# EAGLE board panelize (EAGLE 9.6.2)
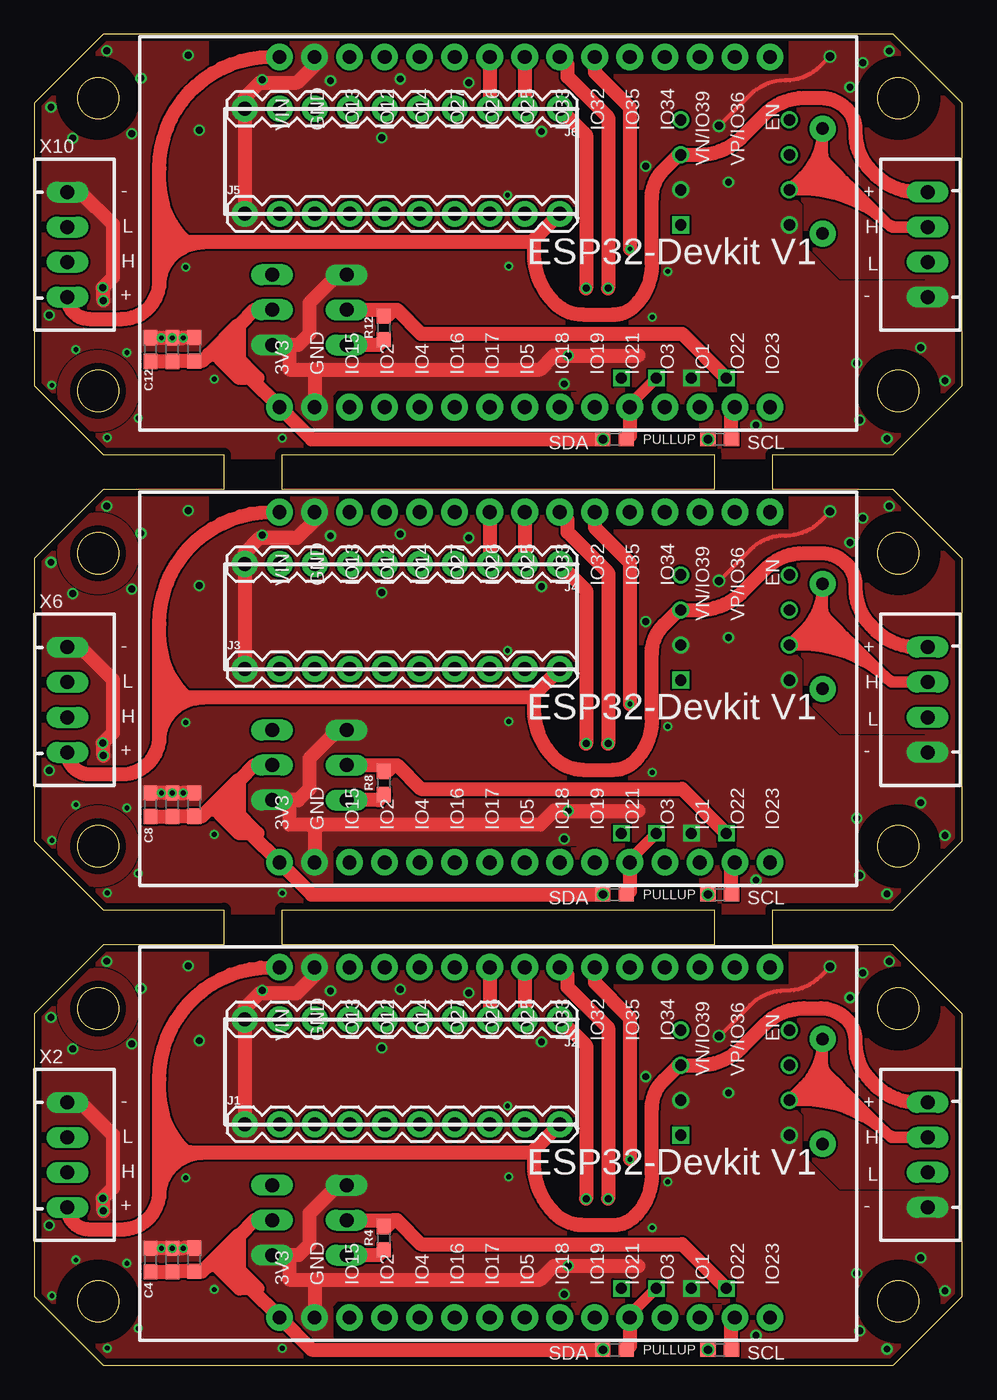
[diagram p0: board, top side]
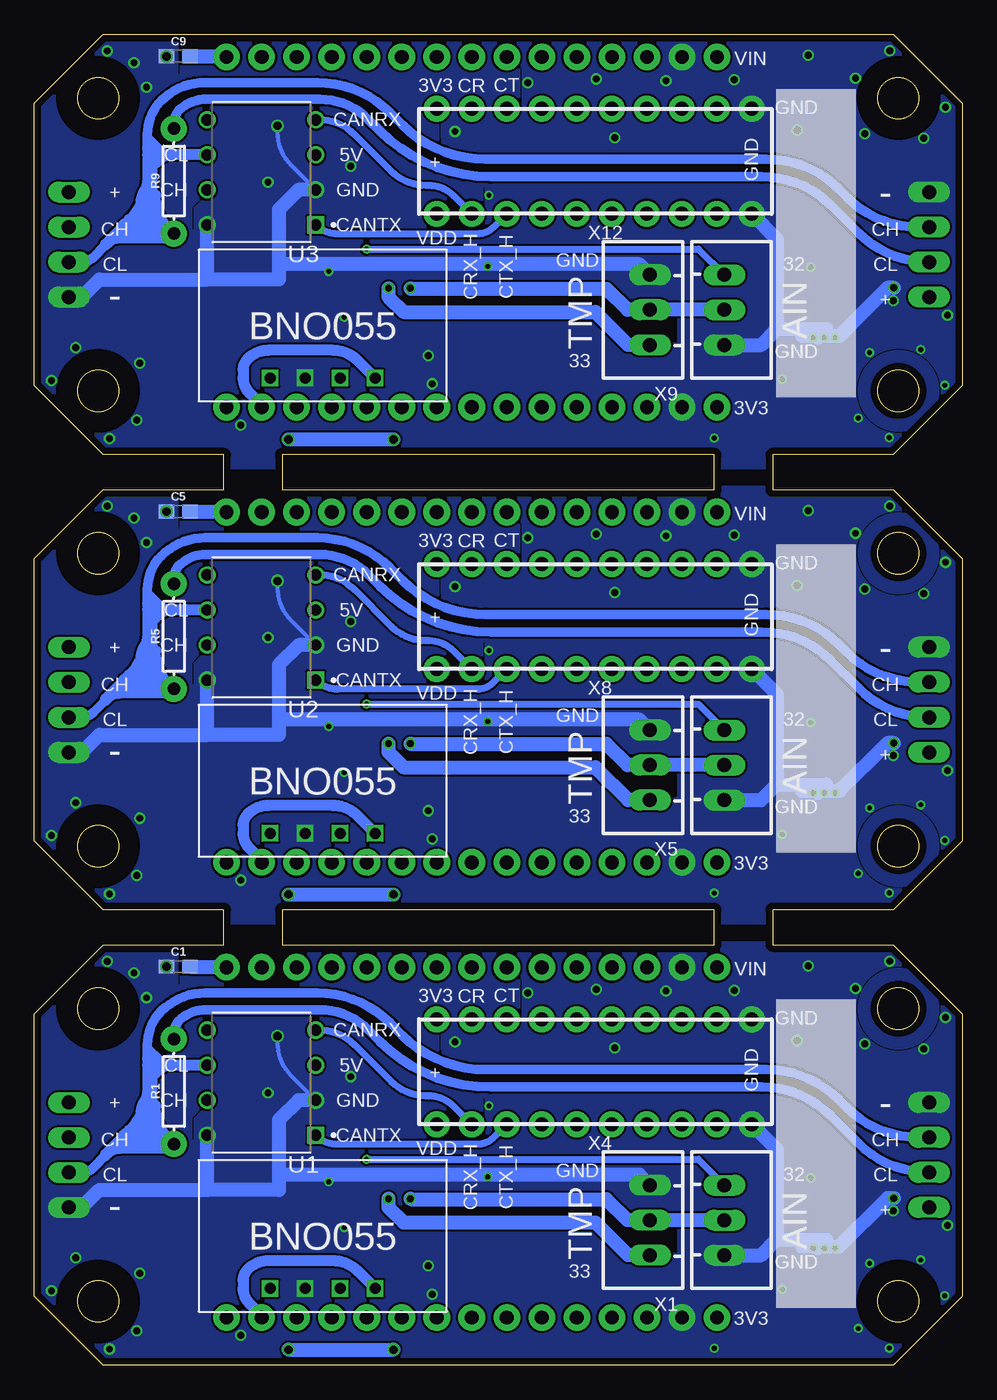
[diagram p1: board, bottom side, seen from below]

Size 67.26 x 96.52 mm. Coordinates in mm from the lower left corner, seen from the top.
Outline: 17.95,66.04 49.31,66.04 49.31,63.5 17.95,63.5 17.95,66.04
Outline: 17.95,33.02 49.31,33.02 49.31,30.48 17.95,30.48 17.95,33.02
Outline: 0,91.52 0,71.04 5,66.04 13.73,66.04 13.73,63.5 5,63.5 0,58.5 0,38.02 5,33.02 13.73,33.02 13.73,30.48 5,30.48 0,25.48 0,5 5,0 62.26,0 67.26,5 67.26,25.48 62.26,30.48 53.53,30.48 53.53,33.02 62.26,33.02 67.26,38.02 67.26,58.5 62.26,63.5 53.53,63.5 53.53,66.04 62.26,66.04 67.26,71.04 67.26,91.52 62.26,96.52 5,96.52 0,91.52
Outline: circle at 4.62,91.9 radius 1.5
Outline: circle at 4.62,70.66 radius 1.5
Outline: circle at 4.62,58.88 radius 1.5
Outline: circle at 4.62,37.64 radius 1.5
Outline: circle at 4.62,4.62 radius 1.5
Outline: circle at 4.62,25.86 radius 1.5
Outline: circle at 62.64,4.62 radius 1.5
Outline: circle at 62.64,25.86 radius 1.5
Outline: circle at 62.64,37.64 radius 1.5
Outline: circle at 62.64,58.88 radius 1.5
Outline: circle at 62.64,91.9 radius 1.5
Outline: circle at 62.64,70.66 radius 1.5
Copper layers (1*16): Top 0.035mm / dielectric 1.6mm / Bottom 0.035mm
Design rules "Elecrow_2-layer_PCB_eagle_rule": minimum track width 6mil, minimum drill 12mil, track to track 6mil, track to pad 6mil, pad to pad 6mil, via to via 8mil, smd to smd 0mil, copper to edge 20mil, drill to drill 10mil, minimum pad ring 6mil, minimum via ring 6mil, stop-mask expansion 0mil, vias tented up to drill 100mil, thermal gap 10mil
Net classes: 1 lev3: clearance 0.5 mm
tRestrict: area 1.6,22.9 to 7.6,28.9; area 1.6,1.6 to 7.6,7.6; area 59.6,1.6 to 65.6,7.6; area 59.6,22.9 to 65.6,28.9; area 1.6,55.9 to 7.6,61.9; area 1.6,34.6 to 7.6,40.6; area 59.6,34.6 to 65.6,40.6; area 59.6,55.9 to 65.6,61.9; area 1.6,88.9 to 7.6,94.9; area 1.6,67.7 to 7.6,73.7; area 59.6,67.7 to 65.6,73.7; area 59.6,88.9 to 65.6,94.9; 45 lines
bRestrict: area 1.6,22.9 to 7.6,28.9; area 1.6,1.6 to 7.6,7.6; area 59.6,1.6 to 65.6,7.6; area 59.6,22.9 to 65.6,28.9; area 1.6,55.9 to 7.6,61.9; area 1.6,34.6 to 7.6,40.6; area 59.6,34.6 to 65.6,40.6; area 59.6,55.9 to 65.6,61.9; area 1.6,88.9 to 7.6,94.9; area 1.6,67.7 to 7.6,73.7; area 59.6,67.7 to 65.6,73.7; area 59.6,88.9 to 65.6,94.9; 27 lines

## Footprints (pad centres in the part's own frame; a part is rotated, then mirrored left to right if it is on the bottom)
0603 = smd 1.1 x 1: 1 -0.85,0; 2 0.85,0
1X10 = drill 1.016 pad 1.88: 1 0,0; 2 2.54,0; 3 5.08,0; 4 7.62,0; 5 10.16,0; 6 12.7,0; 7 15.24,0; 8 17.78,0; 9 20.32,0; 10 22.86,0
AXIAL-0.3 = drill 0.9 pad 1.88: P$1 -3.81,0; P$2 3.81,0
DIP787W45P254L1016H533Q8 = drill 0.83 square: 1 -3.937,3.81 | drill 0.83: 2 -3.937,1.27; 3 -3.937,-1.27; 4 -3.937,-3.81; 5 3.937,-3.81; 6 3.937,-1.27; 7 3.937,1.27; 8 3.937,3.81
ESP32-DEVKITV1 = drill 1 pad 1.93: 3V3 -16.52,-12.27; D1 13.96,-12.27; D2 -8.9,-12.27; D3 11.42,-12.27; D4 -6.36,-12.27; D5 1.26,-12.27; D12 -8.9,13.135; D13 -11.44,13.135; D14 -6.36,13.135; D15 -11.44,-12.27; D16 -3.82,-12.27; D17 -1.28,-12.27; D18 3.8,-12.27; D19 6.34,-12.27; D21 8.88,-12.27; D22 16.5,-12.27; D23 19.04,-12.27; D25 1.26,13.135; D26 -1.28,13.135; D27 -3.82,13.135; D32 6.34,13.135; D33 3.8,13.135; D34 11.42,13.135; D35 8.88,13.135; D36 16.5,13.135; D39 13.96,13.135; EN 19.04,13.135; GND@1 -13.98,13.135; GND@2 -13.98,-12.27; VIN -16.52,13.135
AE-BNO055-BO = drill 0.8 square: GND -1.27,-3.81; SCL 3.81,-3.81; SDA 1.27,-3.81; VIN -3.81,-3.81
JST-XH-03-PACKAGE-LONG-PAD = drill 1.016 long: 1 -2.54,0; 2 0,0; 3 2.54,0
JST-XH-04-PACKAGE-LONG-PAD = drill 1.016 long: 1 -3.81,0; 2 -1.27,0; 3 1.27,0; 4 3.81,0

## Placement (x,y rotation side)
C1  4.7uF  [0603]  56.83,28.89 0 bottom
C2  4.7uF  [0603]  10,7.62 90 top
C3  4.7uF  [0603]  11.59,7.64 90 top
C4  4.7uF  [0603]  8.41,7.62 90 top
C5  4.7uF  [0603]  56.83,61.91 0 bottom
C6  4.7uF  [0603]  10,40.64 90 top
C7  4.7uF  [0603]  11.59,40.66 90 top
C8  4.7uF  [0603]  8.41,40.64 90 top
C9  4.7uF  [0603]  56.83,94.93 0 bottom
C10  4.7uF  [0603]  10,73.66 90 top
C11  4.7uF  [0603]  11.59,73.68 90 top
C12  4.7uF  [0603]  8.41,73.66 90 top
J1  [1X10]  15.24,17.46 0 top
J2  [1X10]  38.1,25.08 180 top
J3  [1X10]  15.24,50.48 0 top
J4  [1X10]  38.1,58.1 180 top
J5  [1X10]  15.24,83.5 0 top
J6  [1X10]  38.1,91.12 180 top
R1  120Ω  [AXIAL-0.3]  57.15,19.84 90 bottom
R2  1k  [0603]  49.69,1.11 180 top
R3  1k  [0603]  42.07,1.11 180 top
R4  4.7k  [0603]  25.33,9.2 90 top
R5  120Ω  [AXIAL-0.3]  57.15,52.86 90 bottom
R6  1k  [0603]  49.69,34.13 180 top
R7  1k  [0603]  42.07,34.13 180 top
R8  4.7k  [0603]  25.33,42.22 90 top
R9  120Ω  [AXIAL-0.3]  57.15,85.88 90 bottom
R10  1k  [0603]  49.69,67.15 180 top
R11  1k  [0603]  42.07,67.15 180 top
R12  4.7k  [0603]  25.33,75.24 90 top
U1  MCP2562-E/P  [DIP787W45P254L1016H533Q8]  50.8,20.48 180 bottom
U2  MCP2562-E/P  [DIP787W45P254L1016H533Q8]  50.8,53.5 180 bottom
U3  MCP2562-E/P  [DIP787W45P254L1016H533Q8]  50.8,86.52 180 bottom
U$1  ESP32DEVKITV1  [ESP32-DEVKITV1]  34.29,15.72 0 top
U$2  ESP32DEVKITV1  [ESP32-DEVKITV1]  34.29,48.74 0 top
U$3  [AE-BNO055-BO]  46.37,9.37 0 bottom
U$4  [AE-BNO055-BO]  46.37,42.39 0 bottom
U$5  ESP32DEVKITV1  [ESP32-DEVKITV1]  34.29,81.76 0 top
U$6  [AE-BNO055-BO]  46.37,75.41 0 bottom
X1  JST-XH-03-PIN-LONG-PAD  [JST-XH-03-PACKAGE-LONG-PAD]  22.63,10.5 90 bottom
X2  JST-XH-04-PIN-LONG-PAD  [JST-XH-04-PACKAGE-LONG-PAD]  2.38,15.24 270 top
X3  JST-XH-04-PIN-LONG-PAD  [JST-XH-04-PACKAGE-LONG-PAD]  64.77,15.24 90 top
X4  JST-XH-03-PIN-LONG-PAD  [JST-XH-03-PACKAGE-LONG-PAD]  17.23,10.5 270 bottom
X5  JST-XH-03-PIN-LONG-PAD  [JST-XH-03-PACKAGE-LONG-PAD]  22.63,43.52 90 bottom
X6  JST-XH-04-PIN-LONG-PAD  [JST-XH-04-PACKAGE-LONG-PAD]  2.38,48.26 270 top
X7  JST-XH-04-PIN-LONG-PAD  [JST-XH-04-PACKAGE-LONG-PAD]  64.77,48.26 90 top
X8  JST-XH-03-PIN-LONG-PAD  [JST-XH-03-PACKAGE-LONG-PAD]  17.23,43.52 270 bottom
X9  JST-XH-03-PIN-LONG-PAD  [JST-XH-03-PACKAGE-LONG-PAD]  22.63,76.54 90 bottom
X10  JST-XH-04-PIN-LONG-PAD  [JST-XH-04-PACKAGE-LONG-PAD]  2.38,81.28 270 top
X11  JST-XH-04-PIN-LONG-PAD  [JST-XH-04-PACKAGE-LONG-PAD]  64.77,81.28 90 top
X12  JST-XH-03-PIN-LONG-PAD  [JST-XH-03-PACKAGE-LONG-PAD]  17.23,76.54 270 bottom

## Library data of the parts
C1-C12 = SparkFun-Capacitors; PROD_ID: CAP-08280
J1-J6 = SparkFun-Connectors; PROD_ID: CONN-11563
R1 R5 R9 = SparkFun-Resistors
R2 R3 R6 R7 R10 R11 = SparkFun-Resistors; PROD_ID: RES-07856
R4 R8 R12 = SparkFun-Resistors; PROD_ID: RES-07857
U1-U3 = MCP2562-E_P; AVAILABILITY: In Stock; DESCRIPTION: 1/1 Transceiver Half CANbus 8-PDIP; MF: Microchip; MP: MCP2562-E/P; PACKAGE: DIP-8 Microchip; PRICE: None; PURCHASE-URL: https://pricing.snapeda.com/search/part/MCP2562-E/P/?ref=eda
U$1 U$2 U$5 = ESP32-DEVKITV1
U$3 U$4 U$6 = AE-BNO055
X1-X12 = JST XH Connectors

## Nets
1WIRE [lev3]: R4.1 U$1.D33 X1.1
1WIRE1 [lev3]: R8.1 U$2.D33 X5.1
1WIRE2 [lev3]: R12.1 U$5.D33 X9.1
3V1: C6.1 C7.1 C8.1 J4.1 R6.2 R7.2 R8.2 U$2.3V3 U$4.VIN X5.2 X8.2
3V2: C10.1 C11.1 C12.1 J6.1 R10.2 R11.2 R12.2 U$5.3V3 U$6.VIN X9.2 X12.2
3V3: C2.1 C3.1 C4.1 J2.1 R2.2 R3.2 R4.2 U$1.3V3 U$3.VIN X1.2 X4.2
AIN: U$1.D32 X4.1
AIN1: U$2.D32 X8.1
AIN2: U$5.D32 X12.1
CAN_RX [lev3]: J2.2 U$1.D25
CAN_RX1 [lev3]: J4.2 U$2.D25
CAN_RX2 [lev3]: J6.2 U$5.D25
CAN_RX_5V: J1.9 U1.4
CAN_RX_5V1: J3.9 U2.4
CAN_RX_5V2: J5.9 U3.4
CAN_TX [lev3]: J2.3 U$1.D26
CAN_TX1 [lev3]: J4.3 U$2.D26
CAN_TX2 [lev3]: J6.3 U$5.D26
CAN_TX_5V: J1.8 U1.1
CAN_TX_5V1: J3.8 U2.1
CAN_TX_5V2: J5.8 U3.1
CANH [lev3]: R1.P$2 U1.7 X2.3 X3.3
CANH1 [lev3]: R5.P$2 U2.7 X6.3 X7.3
CANH2 [lev3]: R9.P$2 U3.7 X10.3 X11.3
CANL [lev3]: R1.P$1 U1.6 X2.2 X3.2
CANL1 [lev3]: R5.P$1 U2.6 X6.2 X7.2
CANL2 [lev3]: R9.P$1 U3.6 X10.2 X11.2
EN: C1.2 U$1.EN
EN1: C5.2 U$2.EN
EN2: C9.2 U$5.EN
GND: C1.1 C2.2 C3.2 C4.2 J1.1 J2.10 U1.2 U1.8 U$1.GND@1 U$1.GND@2 U$3.GND X1.3 X2.1 X3.1 X4.3
GND1: C5.1 C6.2 C7.2 C8.2 J3.1 J4.10 U2.2 U2.8 U$2.GND@1 U$2.GND@2 U$4.GND X5.3 X6.1 X7.1 X8.3
GND2: C9.1 C10.2 C11.2 C12.2 J5.1 J6.10 U3.2 U3.8 U$5.GND@1 U$5.GND@2 U$6.GND X9.3 X10.1 X11.1 X12.3
N$1: U2.5
N$2: U3.5
N$7: U1.5
SCL [lev3]: R2.1 U$1.D22 U$3.SCL
SCL1 [lev3]: R6.1 U$2.D22 U$4.SCL
SCL2 [lev3]: R10.1 U$5.D22 U$6.SCL
SDA [lev3]: R3.1 U$1.D21 U$3.SDA
SDA1 [lev3]: R7.1 U$2.D21 U$4.SDA
SDA2 [lev3]: R11.1 U$5.D21 U$6.SDA
VDD_5V: J1.10 U1.3 U$1.VIN X2.4 X3.4
VDD_5V1: J3.10 U2.3 U$2.VIN X6.4 X7.4
VDD_5V2: J5.10 U3.3 U$5.VIN X10.4 X11.4

## Tracks (layer width: path | path; a pad name or v marks a point on that pad's centre or on a via)
1WIRE  (via drill 0.5)
  Top 1: U$1.D33 38.66,28.29 38.66,27.4 41.59,24.46 v41.59,12.06 | R4.1 24.94,7.96 X1.1
  Bottom 1: X1.1 24.21,7.96 26.6,10.34 40.5,10.34 41.59,11.44 v41.59,12.06
1WIRE1  (via drill 0.5)
  Top 1: U$2.D33 38.66,61.31 38.66,60.42 41.59,57.48 v41.59,45.09 | R8.1 24.94,40.98 X5.1
  Bottom 1: X5.1 24.21,40.98 26.6,43.36 40.5,43.36 41.59,44.46 v41.59,45.09
1WIRE2  (via drill 0.5)
  Top 1: U$5.D33 38.66,94.33 38.66,93.44 41.59,90.5 v41.59,78.11 | R12.1 24.94,74 X9.1
  Bottom 1: X9.1 24.21,74 26.6,76.38 40.5,76.38 41.59,77.48 v41.59,78.11
3V1  (via drill 0.5, 0.6)
  Top 1: v40.01,45.09 40.01,56.2 J4.1 | 14.84,41.45 14.84,40.19 14.55,40.19 | 14.84,41.45 14.84,42.41 | X8.2 15.95,43.52 14.84,42.41 | U$4.VIN 46.96,41.79 28.03,41.79 26.3,43.52 26.03,43.52 | R7.2 20.11,34.13 U$2.3V3 15.66,38.58 | 14.55,40.19 16.16,38.58 15.66,38.58 | 12.63,40.29 14.45,40.29 14.55,40.19 | 14.84,42.41 14.75,42.41 12.63,40.29 | 12.63,40.29 12.15,39.81 C7.1 10.02,39.81 C6.1 C8.1 | 14.55,40.19 13.58,40.19 | 14.84,41.45 13.58,40.19 | 13.58,40.19 13.41,40.02 14.86,38.58 15.66,38.58 | X5.2 26.03,43.52 | R8.2 25.58,43.07 26.03,43.52
  Bottom 1: v40.01,45.09 39.98,45.05 25.79,45.05 24.26,43.52 X5.2 X8.2 | R6.2 R7.2
  other vias: 48.84,34.13 41.22,34.13
3V2  (via drill 0.5, 0.6)
  Top 1: v40.01,78.11 40.01,89.22 J6.1 | 14.84,74.47 14.84,73.21 14.55,73.21 | 14.84,74.47 14.84,75.43 | X12.2 15.95,76.54 14.84,75.43 | U$6.VIN 46.96,74.81 28.03,74.81 26.3,76.54 26.03,76.54 | R11.2 20.11,67.15 U$5.3V3 15.66,71.6 | 14.55,73.21 16.16,71.6 15.66,71.6 | 12.63,73.31 14.45,73.31 14.55,73.21 | 14.84,75.43 14.75,75.43 12.63,73.31 | 12.63,73.31 12.15,72.83 C11.1 10.02,72.83 C10.1 C12.1 | 14.55,73.21 13.58,73.21 | 14.84,74.47 13.58,73.21 | 13.58,73.21 13.41,73.04 14.86,71.6 15.66,71.6 | X9.2 26.03,76.54 | R12.2 25.58,76.09 26.03,76.54
  Bottom 1: v40.01,78.11 39.98,78.08 25.79,78.08 24.26,76.54 X9.2 X12.2 | R10.2 R11.2
  other vias: 48.84,67.15 41.22,67.15
3V3  (via drill 0.5, 0.6)
  Top 1: v40.01,12.06 40.01,23.18 J2.1 | 14.84,8.43 14.84,7.17 14.55,7.17 | 14.84,8.43 14.84,9.39 | X4.2 15.95,10.5 14.84,9.39 | U$3.VIN 46.96,8.77 28.03,8.77 26.3,10.5 26.03,10.5 | R3.2 20.11,1.11 U$1.3V3 15.66,5.56 | 14.55,7.17 16.16,5.56 15.66,5.56 | 12.63,7.27 14.45,7.27 14.55,7.17 | 14.84,9.39 14.75,9.39 12.63,7.27 | 12.63,7.27 12.15,6.79 C3.1 10.02,6.79 C2.1 C4.1 | 14.55,7.17 13.58,7.17 | 14.84,8.43 13.58,7.17 | 13.58,7.17 13.41,7 14.86,5.56 15.66,5.56 | X1.2 26.03,10.5 | R4.2 25.58,10.05 26.03,10.5
  Bottom 1: v40.01,12.06 39.98,12.04 25.79,12.04 24.26,10.5 X1.2 X4.2 | R2.2 R3.2
  other vias: 48.84,1.11 41.22,1.11
AIN  (via drill 0.35)
  Top 1: U$1.D32 40.63,27.74 43.18,25.19 v43.18,14.92
  Bottom 0.5: X4.1 19.11,14.92 v43.18,14.92
AIN1  (via drill 0.35)
  Top 1: U$2.D32 40.63,60.76 43.18,58.21 v43.18,47.94
  Bottom 0.5: X8.1 19.11,47.94 v43.18,47.94
AIN2  (via drill 0.35)
  Top 1: U$5.D32 40.63,93.78 43.18,91.23 v43.18,80.96
  Bottom 0.5: X12.1 19.11,80.96 v43.18,80.96
CAN_RX
  Top 1: U$1.D25 35.55,25.09 J2.2
CAN_RX1
  Top 1: U$2.D25 35.55,58.11 J4.2
CAN_RX2
  Top 1: U$5.D25 35.55,91.13 J6.2
CAN_RX_5V
  Bottom 0.5: J1.9 36.87,18.78 arc-45 38.67,19.52 38.87,19.52 arc45 41.38,20.56 44.04,23.22 arc-45 46.62,24.29 U1.4
CAN_RX_5V1
  Bottom 0.5: J3.9 36.87,51.8 arc-45 38.67,52.54 38.87,52.54 arc45 41.38,53.58 44.04,56.24 arc-45 46.62,57.31 U2.4
CAN_RX_5V2
  Bottom 0.5: J5.9 36.87,84.82 arc-45 38.67,85.56 38.87,85.56 arc45 41.38,86.6 44.04,89.26 arc-45 46.62,90.33 U3.4
CAN_TX
  Top 1: U$1.D26 33.01,25.09 J2.3
CAN_TX1
  Top 1: U$2.D26 33.01,58.11 J4.3
CAN_TX2
  Top 1: U$5.D26 33.01,91.13 J6.3
CAN_TX_5V
  Bottom 0.5: J1.8 34.01,16.48 arc45 35.13,16.01 45.27,16.01 arc45 U1.1
CAN_TX_5V1
  Bottom 0.5: J3.8 34.01,49.49 arc45 35.13,49.03 45.27,49.03 arc45 U2.1
CAN_TX_5V2
  Bottom 0.5: J5.8 34.01,82.52 arc45 35.13,82.05 45.27,82.05 arc45 U3.1
CANH
  Top 0.152: R1.P$2 57.5,23.5 57.15,23.5
  Top 0.8: 55.74,20.21 arc45 57.15,23.61 57.15,23.5 57.15,21.96 | 57.52,21.06 arc-45 57.15,21.96 | 59.37,19.21 61.7,16.88 arc45 62.6,16.51 X3.3 62.13,16.51 arc45 55.62,19.21 U1.7 | 59.37,19.21 58.74,19.84 | 58.74,19.84 58.34,20.24 | 58.34,20.24 57.52,21.06 | U1.7 55.74,20.21 | U1.7 55,19.47 arc-45 55.9,19.84 57.31,19.84 | 57.31,19.84 58.74,19.84 | 59.37,19.21 58.47,19.21 arc-45 57.57,19.58 57.31,19.84 | 58.34,20.24 55.81,20.24 arc45 55.74,20.21 | 55.74,20.21 56.15,20.21 arc45 57.05,20.58 | 57.05,20.58 57.52,21.06 | 57.15,21.96 arc45 57.05,21.71 57.05,20.58
  Bottom 0.152: R1.P$2 57,24 57.15,24.08
  Bottom 0.7: X2.3 2.41,13.97 arc45 7.51,16.08 9.53,18.1 arc-45 14.51,20.16 34.19,20.16 arc45 42.22,23.49 43.04,24.31 arc-45 46.59,25.78 54.83,25.78 arc-45 56.78,24.97 arc-45 57.15,24.08
CANH1
  Top 0.152: R5.P$2 57.5,56.52 57.15,56.52
  Top 0.8: 55.74,53.23 arc45 57.15,56.63 57.15,56.52 57.15,54.98 | 57.52,54.08 arc-45 57.15,54.98 | 59.37,52.23 61.7,49.9 arc45 62.6,49.53 X7.3 62.13,49.53 arc45 55.62,52.23 U2.7 | 59.37,52.23 58.74,52.86 | 58.74,52.86 58.34,53.26 | 58.34,53.26 57.52,54.08 | U2.7 55.74,53.23 | U2.7 55,52.49 arc-45 55.9,52.86 57.31,52.86 | 57.31,52.86 58.74,52.86 | 59.37,52.23 58.47,52.23 arc-45 57.57,52.6 57.31,52.86 | 58.34,53.26 55.81,53.26 arc45 55.74,53.23 | 55.74,53.23 56.15,53.23 arc45 57.05,53.6 | 57.05,53.6 57.52,54.08 | 57.15,54.98 arc45 57.05,54.73 57.05,53.6
  Bottom 0.152: R5.P$2 57,57.02 57.15,57.1
  Bottom 0.7: X6.3 2.41,46.99 arc45 7.51,49.1 9.53,51.12 arc-45 14.51,53.18 34.19,53.18 arc45 42.22,56.51 43.04,57.33 arc-45 46.59,58.8 54.83,58.8 arc-45 56.78,57.99 arc-45 57.15,57.1
CANH2
  Top 0.152: R9.P$2 57.5,89.54 57.15,89.54
  Top 0.8: 55.74,86.25 arc45 57.15,89.66 57.15,89.54 57.15,88 | 57.52,87.1 arc-45 57.15,88 | 59.37,85.25 61.7,82.92 arc45 62.6,82.55 X11.3 62.13,82.55 arc45 55.62,85.25 U3.7 | 59.37,85.25 58.74,85.88 | 58.74,85.88 58.34,86.28 | 58.34,86.28 57.52,87.1 | U3.7 55.74,86.25 | U3.7 55,85.51 arc-45 55.9,85.88 57.31,85.88 | 57.31,85.88 58.74,85.88 | 59.37,85.25 58.47,85.25 arc-45 57.57,85.62 57.31,85.88 | 58.34,86.28 55.81,86.28 arc45 55.74,86.25 | 55.74,86.25 56.15,86.25 arc45 57.05,86.62 | 57.05,86.62 57.52,87.1 | 57.15,88 arc45 57.05,87.75 57.05,86.62
  Bottom 0.152: R9.P$2 57,90.04 57.15,90.12
  Bottom 0.7: X10.3 2.41,80.01 arc45 7.51,82.12 9.53,84.14 arc-45 14.51,86.2 34.19,86.2 arc45 42.22,89.53 43.04,90.35 arc-45 46.59,91.82 54.83,91.82 arc-45 56.78,91.01 arc-45 57.15,90.12
CANL
  Top 0.8: 57.41,16.3 R1.P$1 57.31,16.2
  Bottom 0.152: R1.P$1 57.5,16 57.44,16.33
  Bottom 0.7: X2.2 3.11,16.51 arc45 8.37,18.69 8.94,19.25 arc-45 14.19,21.43 34.57,21.43 arc45 40.59,23.93 41.48,24.81 arc-45 46.73,26.99 54.9,26.99 arc-45 58.07,25.68 arc-45 59.07,23.25 59.07,23.02 | X3.2 63.87,13.97 arc-45 62.97,14.34 62.15,15.16 62.15,15.32 60.96,16.51 60.8,16.67 60.42,17.05 arc-45 59.07,20.3 | 59.07,20.3 59.07,19.4 | 59.07,20.3 59.07,20.48 | 59.07,20.48 59.07,21.75 59.07,22.23 59.07,23.02 | 58.05,16.93 57.44,16.33 arc45 58.46,18.79 | 57.28,21.75 arc45 58.17,22.12 59.07,23.02 | U1.6 57.28,21.75 | 57.28,21.75 arc-45 58.17,21.38 58.75,20.8 59.07,20.48
  Bottom 0.8: U1.6 59.07,21.75 | 59.07,22.23 arc45 58.75,21.44 58.75,20.8 58.75,17.48 arc45 59.07,16.7 59.07,16.98 | 57.47,15.72 61.13,15.72 arc-45 61.92,15.39 62.15,15.16 | 57.41,16.3 arc-45 57.93,16.51 60.96,16.51 | 60.8,16.67 arc45 60.16,16.93 59.37,16.93 | 59.37,16.93 59.05,16.93 | 59.37,16.93 59.53,17 | 59.53,17 arc-45 59.66,17.05 60.42,17.05 | 59.07,19.4 arc-45 59.53,18.29 59.53,17 | 58.05,16.93 59.05,16.93 | 59.07,19.4 59.07,16.98 | 59.07,16.98 arc-45 59.05,16.93 | 59.07,19.4 58.46,18.79
  Bottom 1: R1.P$1 57.47,15.72
CANL1
  Top 0.8: 57.41,49.32 R5.P$1 57.31,49.22
  Bottom 0.152: R5.P$1 57.5,49.02 57.44,49.35
  Bottom 0.7: X6.2 3.11,49.53 arc45 8.37,51.71 8.94,52.27 arc-45 14.19,54.45 34.57,54.45 arc45 40.59,56.95 41.48,57.83 arc-45 46.73,60.01 54.9,60.01 arc-45 58.07,58.7 arc-45 59.07,56.27 59.07,56.04 | X7.2 63.87,46.99 arc-45 62.97,47.36 62.15,48.18 62.15,48.34 60.96,49.53 60.8,49.69 60.42,50.07 arc-45 59.07,53.32 | 59.07,53.32 59.07,52.42 | 59.07,53.32 59.07,53.5 | 59.07,53.5 59.07,54.77 59.07,55.24 59.07,56.04 | 58.05,49.95 57.44,49.35 arc45 58.46,51.81 | 57.28,54.77 arc45 58.17,55.14 59.07,56.04 | U2.6 57.28,54.77 | 57.28,54.77 arc-45 58.17,54.4 58.75,53.83 59.07,53.5
  Bottom 0.8: U2.6 59.07,54.77 | 59.07,55.24 arc45 58.75,54.46 58.75,53.83 58.75,50.5 arc45 59.07,49.72 59.07,49.99 | 57.47,48.74 61.13,48.74 arc-45 61.92,48.41 62.15,48.18 | 57.41,49.32 arc-45 57.93,49.53 60.96,49.53 | 60.8,49.69 arc45 60.16,49.95 59.37,49.95 | 59.37,49.95 59.05,49.95 | 59.37,49.95 59.53,50.02 | 59.53,50.02 arc-45 59.66,50.07 60.42,50.07 | 59.07,52.42 arc-45 59.53,51.31 59.53,50.02 | 58.05,49.95 59.05,49.95 | 59.07,52.42 59.07,49.99 | 59.07,49.99 arc-45 59.05,49.95 | 59.07,52.42 58.46,51.81
  Bottom 1: R5.P$1 57.47,48.74
CANL2
  Top 0.8: 57.41,82.34 R9.P$1 57.31,82.24
  Bottom 0.152: R9.P$1 57.5,82.04 57.44,82.37
  Bottom 0.7: X10.2 3.11,82.55 arc45 8.37,84.73 8.94,85.3 arc-45 14.19,87.47 34.57,87.47 arc45 40.59,89.97 41.48,90.85 arc-45 46.73,93.03 54.9,93.03 arc-45 58.07,91.72 arc-45 59.07,89.29 59.07,89.06 | X11.2 63.87,80.01 arc-45 62.97,80.38 62.15,81.2 62.15,81.36 60.96,82.55 60.8,82.71 60.42,83.09 arc-45 59.07,86.34 | 59.07,86.34 59.07,85.44 | 59.07,86.34 59.07,86.52 | 59.07,86.52 59.07,87.79 59.07,88.27 59.07,89.06 | 58.05,82.97 57.44,82.37 arc45 58.46,84.83 | 57.28,87.79 arc45 58.17,88.16 59.07,89.06 | U3.6 57.28,87.79 | 57.28,87.79 arc-45 58.17,87.42 58.75,86.84 59.07,86.52
  Bottom 0.8: U3.6 59.07,87.79 | 59.07,88.27 arc45 58.75,87.48 58.75,86.84 58.75,83.52 arc45 59.07,82.74 59.07,83.02 | 57.47,81.76 61.13,81.76 arc-45 61.92,81.43 62.15,81.2 | 57.41,82.34 arc-45 57.93,82.55 60.96,82.55 | 60.8,82.71 arc45 60.16,82.97 59.37,82.97 | 59.37,82.97 59.05,82.97 | 59.37,82.97 59.53,83.04 | 59.53,83.04 arc-45 59.66,83.09 60.42,83.09 | 59.07,85.44 arc-45 59.53,84.33 59.53,83.04 | 58.05,82.97 59.05,82.97 | 59.07,85.44 59.07,83.02 | 59.07,83.02 arc-45 59.05,82.97 | 59.07,85.44 58.46,84.83
  Bottom 1: R9.P$1 57.47,81.76
EN
  Bottom 1: C1.2 53.33,28.89 U$1.EN
EN1
  Bottom 1: C5.2 53.33,61.91 U$2.EN
EN2
  Bottom 1: C9.2 53.33,94.93 U$5.EN
GND  (via drill 0.35, 0.5, 0.6)
  Top 0.3: C1.1 56.96,28.17 arc-45 54.48,27.15 54.41,27.15 arc45 51.9,26.11 v49.64,23.85
  Top 1: J1.1 J2.10 15.24,25.88 16.35,26.99 19.05,26.99 20.31,28.25 U$1.GND@1 | X1.3 21.99,13.04 19.93,10.98 19.93,8.76 19.14,7.96 X4.3 18.49,7.96 18.49,6.18 20.31,6.18 | 20.31,6.18 U$1.GND@2 | X2.1 3.33,19.05 5.68,16.71 5.68,12.84 v4.94,12.1 5,12.04 v5,11.18 | C3.2 10.81,8.49 v10.79,8.47 C2.2 C4.2 | 20.31,6.18 36.66,6.18 37.66,7.18 43.82,7.18
  Bottom 0.3: v49.64,23.85 49.64,23.35 arc-45 48.68,21.03 U1.2
  Bottom 1: J1.1 13.42,15.64 13.42,9.11 | 13.42,9.11 14.57,7.96 X4.3 | X1.3 23.39,13.8 49.53,13.8 | 13.42,9.11 9.82,9.11 10.46,8.47 | v4.94,12.1 5.4,12.1 8.89,8.61 11.59,8.61 | 54.74,12.7 49.53,12.7 49.53,13.8 | 54.74,12.7 U1.8 | U1.2 48.1,19.21 49.53,17.78 49.53,13.8 | X3.1 63.82,11.43 62.55,12.7 54.74,12.7
  other vias: 57.68,28.89 10,8.47 9.21,8.47 1.2,25.21 2.78,22.94 7.06,23.28 5.23,29.29 7.73,27.31 1.06,10.12 11.96,23.53 11.15,28.96 25.19,23 36.77,23.44 50.33,19.75 61.82,1.16 59.85,2.49 59.62,6.64 64.26,7.77 66.03,5.38 59.14,26.65 60.05,28.43 61.99,29.28 34.38,13.66 5.29,1.23 7.53,2.65 6.71,7.39 3,7.62 1.26,5.03 38.72,7.19 44.8,9.97 34.3,18.81 31.49,26.98 45.92,13.29 44.34,20.92 21.47,27.13 16.53,27.18 26.53,27.25 10.96,13.59 52.32,2.15 38.41,5.13 17.96,1.21 13.04,5.48
  pour Bottom (no thermals): -2.62,30.64 -2.62,-2.22 71.64,-2.22 71.64,30.64
  pour Top (no thermals): -3.73,31.27 -3.73,-1.43 74.14,-1.43 74.14,31.27
GND1  (via drill 0.35, 0.5, 0.6)
  Top 0.3: C5.1 56.96,61.19 arc-45 54.48,60.17 54.41,60.17 arc45 51.9,59.13 v49.64,56.87
  Top 1: J3.1 J4.10 15.24,58.9 16.35,60.01 19.05,60.01 20.31,61.27 U$2.GND@1 | X5.3 21.99,46.06 19.93,44 19.93,41.77 19.14,40.98 X8.3 18.49,40.98 18.49,39.2 20.31,39.2 | 20.31,39.2 U$2.GND@2 | X6.1 3.33,52.07 5.68,49.73 5.68,45.86 v4.94,45.12 5,45.06 v5,44.2 | C7.2 10.81,41.51 v10.79,41.49 C6.2 C8.2 | 20.31,39.2 36.66,39.2 37.66,40.2 43.82,40.2
  Bottom 0.3: v49.64,56.87 49.64,56.37 arc-45 48.68,54.05 U2.2
  Bottom 1: J3.1 13.42,48.66 13.42,42.13 | 13.42,42.13 14.57,40.98 X8.3 | X5.3 23.39,46.82 49.53,46.82 | 13.42,42.13 9.82,42.13 10.46,41.49 | v4.94,45.12 5.4,45.12 8.89,41.63 11.59,41.63 | 54.74,45.72 49.53,45.72 49.53,46.82 | 54.74,45.72 U2.8 | U2.2 48.1,52.23 49.53,50.8 49.53,46.82 | X7.1 63.82,44.45 62.55,45.72 54.74,45.72
  other vias: 57.68,61.91 10,41.49 9.21,41.49 1.2,58.23 2.78,55.96 7.06,56.3 5.23,62.31 7.73,60.33 1.06,43.14 11.96,56.55 11.15,61.98 25.19,56.02 36.77,56.46 50.33,52.77 61.82,34.18 59.85,35.51 59.62,39.66 64.26,40.79 66.03,38.4 59.14,59.67 60.05,61.45 61.99,62.3 34.38,46.68 5.29,34.25 7.53,35.67 6.71,40.41 3,40.64 1.26,38.05 38.72,40.21 44.8,42.99 34.3,51.83 31.49,60 45.92,46.31 44.34,53.94 21.47,60.15 16.53,60.2 26.53,60.27 10.96,46.61 52.32,35.17 38.41,38.15 17.96,34.23 13.04,38.5
  pour Bottom (no thermals): -2.62,63.66 -2.62,32.07 71.64,32.07 71.64,63.66
  pour Top (no thermals): -3.73,64.29 -3.73,32.86 74.14,32.86 74.14,64.29
GND2  (via drill 0.35, 0.5, 0.6)
  Top 0.3: C9.1 56.96,94.21 arc-45 54.48,93.19 54.41,93.19 arc45 51.9,92.15 v49.64,89.89
  Top 1: J5.1 J6.10 15.24,91.92 16.35,93.03 19.05,93.03 20.31,94.29 U$5.GND@1 | X9.3 21.99,79.08 19.93,77.02 19.93,74.8 19.14,74 X12.3 18.49,74 18.49,72.22 20.31,72.22 | 20.31,72.22 U$5.GND@2 | X10.1 3.33,85.09 5.68,82.75 5.68,78.88 v4.94,78.14 5,78.08 v5,77.22 | C11.2 10.81,74.53 v10.79,74.51 C10.2 C12.2 | 20.31,72.22 36.66,72.22 37.66,73.22 43.82,73.22
  Bottom 0.3: v49.64,89.89 49.64,89.39 arc-45 48.68,87.07 U3.2
  Bottom 1: J5.1 13.42,81.68 13.42,75.15 | 13.42,75.15 14.57,74 X12.3 | X9.3 23.39,79.84 49.53,79.84 | 13.42,75.15 9.82,75.15 10.46,74.51 | v4.94,78.14 5.4,78.14 8.89,74.65 11.59,74.65 | 54.74,78.74 49.53,78.74 49.53,79.84 | 54.74,78.74 U3.8 | U3.2 48.1,85.25 49.53,83.82 49.53,79.84 | X11.1 63.82,77.47 62.55,78.74 54.74,78.74
  other vias: 57.68,94.93 10,74.51 9.21,74.51 1.2,91.25 2.78,88.98 7.06,89.32 5.23,95.33 7.73,93.35 1.06,76.16 11.96,89.57 11.15,95 25.19,89.04 36.77,89.48 50.33,85.79 61.82,67.2 59.85,68.53 59.62,72.68 64.26,73.81 66.03,71.42 59.14,92.69 60.05,94.47 61.99,95.32 34.38,79.7 5.29,67.27 7.53,68.69 6.71,73.43 3,73.66 1.26,71.07 38.72,73.23 44.8,76.01 34.3,84.85 31.49,93.02 45.92,79.33 44.34,86.96 21.47,93.17 16.53,93.22 26.53,93.29 10.96,79.63 52.32,68.19 38.41,71.17 17.96,67.25 13.04,71.52
  pour Bottom (no thermals): -2.62,100.49 -2.62,65.09 71.64,65.09 71.64,100.49
  pour Top (no thermals): -3.73,101.12 -3.73,65.88 74.14,65.88 74.14,101.12
SCL
  Top 1: R2.1 50.54,3.19 U$1.D22
  Bottom 0.8: U$3.SCL 43.83,6.83 arc-45 45.62,7.57 50.3,7.57 arc-45 51.79,6.95 arc-45 52.13,6.14 52.13,5.59 arc-45 51.66,4.46 50.79,3.59 U$1.D22
SCL1
  Top 1: R6.1 50.54,36.22 U$2.D22
  Bottom 0.8: U$4.SCL 43.83,39.85 arc-45 45.62,40.59 50.3,40.59 arc-45 51.79,39.97 arc-45 52.13,39.16 52.13,38.61 arc-45 51.66,37.48 50.79,36.61 U$2.D22
SCL2
  Top 1: R10.1 50.54,69.23 U$5.D22
  Bottom 0.8: U$6.SCL 43.83,72.87 arc-45 45.62,73.61 50.3,73.61 arc-45 51.79,72.99 arc-45 52.13,72.18 52.13,71.63 arc-45 51.66,70.5 50.79,69.63 U$5.D22
SDA
  Top 0.8: U$3.SDA 43.17,3.63 U$1.D21
  Top 1: U$1.D21 43.17,1.47 42.92,1.22 R3.1 43.17,1.36 U$1.D21
SDA1
  Top 0.8: U$4.SDA 43.17,36.65 U$2.D21
  Top 1: U$2.D21 43.17,34.49 42.92,34.24 R7.1 43.17,34.38 U$2.D21
SDA2
  Top 0.8: U$6.SDA 43.17,69.67 U$5.D21
  Top 1: U$5.D21 43.17,67.51 42.92,67.26 R11.1 43.17,67.4 U$5.D21
VDD_5V
  Top 1: J1.10 36.04,15.4 | X2.4 arc90 3.97,9.84 6.35,9.84 arc90 9.05,12.54 | U$1.VIN 17.14,28.85 arc90 9.05,20.75 9.05,19.64 | 9.05,12.54 9.05,12.22 arc-90 12.22,15.4 | 9.05,12.54 9.05,14.13 | 9.05,14.13 9.05,15.4 | 9.05,15.4 9.05,19.64 | 36.04,15.4 36.24,15.4 36.24,14.59 arc45 37.72,11 arc45 39.74,10.16 41.99,10.16 arc45 43.53,10.8 arc45 44.77,13.79 44.77,18.6 arc-45 45.62,20.67 46.7,21.75 U1.3 48.19,21.75 arc45 51.29,23.04 52.96,24.7 arc-45 55.79,25.88 57.02,25.88 arc-45 58.87,25.11 58.9,25.08 arc-45 59.53,23.55 59.53,23.31 arc45 60.63,20.64 60.94,20.34 arc45 64.05,19.05 X3.4 | 36.04,15.4 12.22,15.4 | 9.05,19.64 arc47 11.02,15.41 9.68,16.03 9.89,15.82 | 9.89,15.82 10.16,15.56 9.65,15.48 | 9.65,15.48 9.05,15.4 | 9.89,15.82 9.05,14.13 | 12.22,15.4 9.65,15.48
VDD_5V1
  Top 1: J3.10 36.04,48.42 | X6.4 arc90 3.97,42.86 6.35,42.86 arc90 9.05,45.56 | U$2.VIN 17.14,61.87 arc90 9.05,53.77 9.05,52.66 | 9.05,45.56 9.05,45.24 arc-90 12.22,48.42 | 9.05,45.56 9.05,47.15 | 9.05,47.15 9.05,48.42 | 9.05,48.42 9.05,52.66 | 36.04,48.42 36.24,48.42 36.24,47.61 arc45 37.72,44.02 arc45 39.74,43.18 41.99,43.18 arc45 43.53,43.82 arc45 44.77,46.81 44.77,51.62 arc-45 45.62,53.69 46.7,54.77 U2.3 48.19,54.77 arc45 51.29,56.05 52.96,57.72 arc-45 55.79,58.9 57.02,58.9 arc-45 58.87,58.13 58.9,58.1 arc-45 59.53,56.57 59.53,56.33 arc45 60.63,53.66 60.94,53.36 arc45 64.05,52.07 X7.4 | 36.04,48.42 12.22,48.42 | 9.05,52.66 arc47 11.02,48.43 9.68,49.05 9.89,48.84 | 9.89,48.84 10.16,48.58 9.65,48.5 | 9.65,48.5 9.05,48.42 | 9.89,48.84 9.05,47.15 | 12.22,48.42 9.65,48.5
VDD_5V2
  Top 1: J5.10 36.04,81.44 | X10.4 arc90 3.97,75.88 6.35,75.88 arc90 9.05,78.58 | U$5.VIN 17.14,94.89 arc90 9.05,86.8 9.05,85.68 | 9.05,78.58 9.05,78.26 arc-90 12.22,81.44 | 9.05,78.58 9.05,80.17 | 9.05,80.17 9.05,81.44 | 9.05,81.44 9.05,85.68 | 36.04,81.44 36.24,81.44 36.24,80.63 arc45 37.72,77.04 arc45 39.74,76.2 41.99,76.2 arc45 43.53,76.84 arc45 44.77,79.83 44.77,84.64 arc-45 45.62,86.71 46.7,87.79 U3.3 48.19,87.79 arc45 51.29,89.08 52.96,90.74 arc-45 55.79,91.92 57.02,91.92 arc-45 58.87,91.15 58.9,91.12 arc-45 59.53,89.59 59.53,89.35 arc45 60.63,86.69 60.94,86.38 arc45 64.05,85.09 X11.4 | 36.04,81.44 12.22,81.44 | 9.05,85.68 arc47 11.02,81.45 9.68,82.07 9.89,81.86 | 9.89,81.86 10.16,81.6 9.65,81.52 | 9.65,81.52 9.05,81.44 | 9.89,81.86 9.05,80.17 | 12.22,81.44 9.65,81.52

## Text on the board
tPlace: - | + | L | H | H | L | + | - | SDA | PULLUP | SCL | - | + | L | H | H | L | + | - | SDA | PULLUP | SCL | - | + | L | H | H | L | + | - | SDA | PULLUP | SCL
bPlace: VIN | CT | CR | 3V3 | GND | CANRX | 5V | CL | GND | + | - | GND | CH | + | CANTX | CH | VDD | CH | CL | 32 | GND | CTX_H | CRX_H | CL | - | + | AIN | TMP | GND | 33 | 3V3 | VIN | CT | CR | 3V3 | GND | CANRX | 5V | CL | GND | + | - | GND | CH | + | CANTX | CH | VDD | CH | CL | 32 | GND | CTX_H | CRX_H | CL | - | + | AIN | TMP | GND | 33 | 3V3 | VIN | CT | CR | 3V3 | GND | CANRX | 5V | CL | GND | + | - | GND | CH | + | CANTX | CH | VDD | CH | CL | 32 | GND | CTX_H | CRX_H | CL | - | + | AIN | TMP | GND | 33 | 3V3
bStop: LoggerV1 | LoggerV1 | LoggerV1